# EAGLE board SaltwatersNanaPanel (EAGLE 9.6.2), part 1 of 2
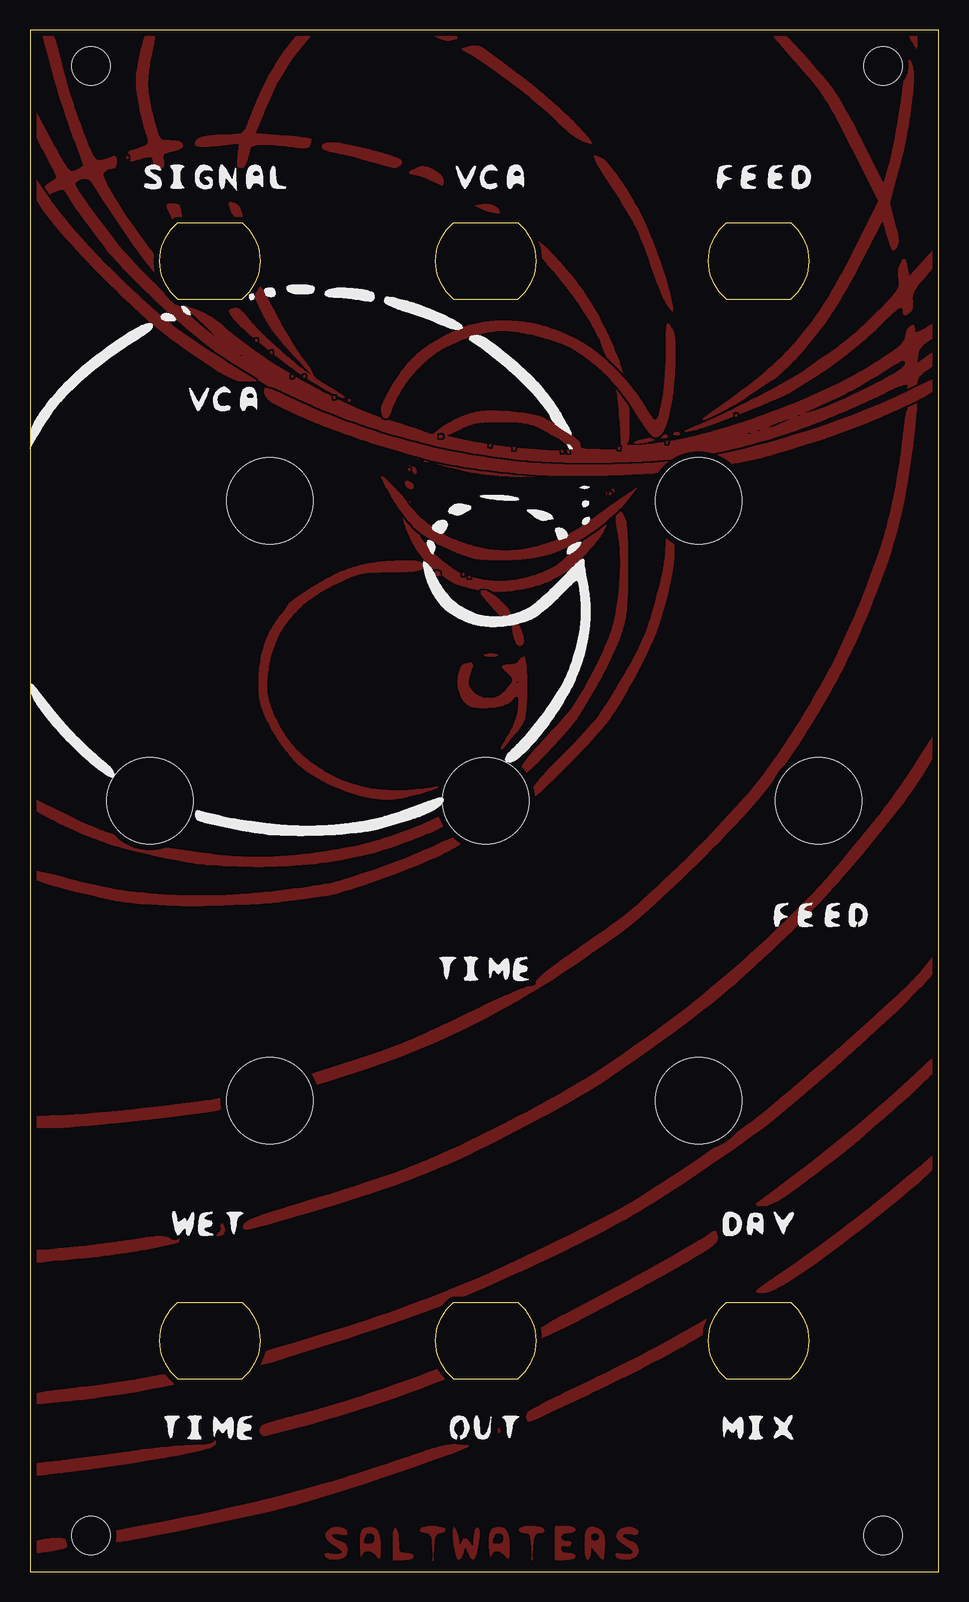
[diagram p0: board, top side]
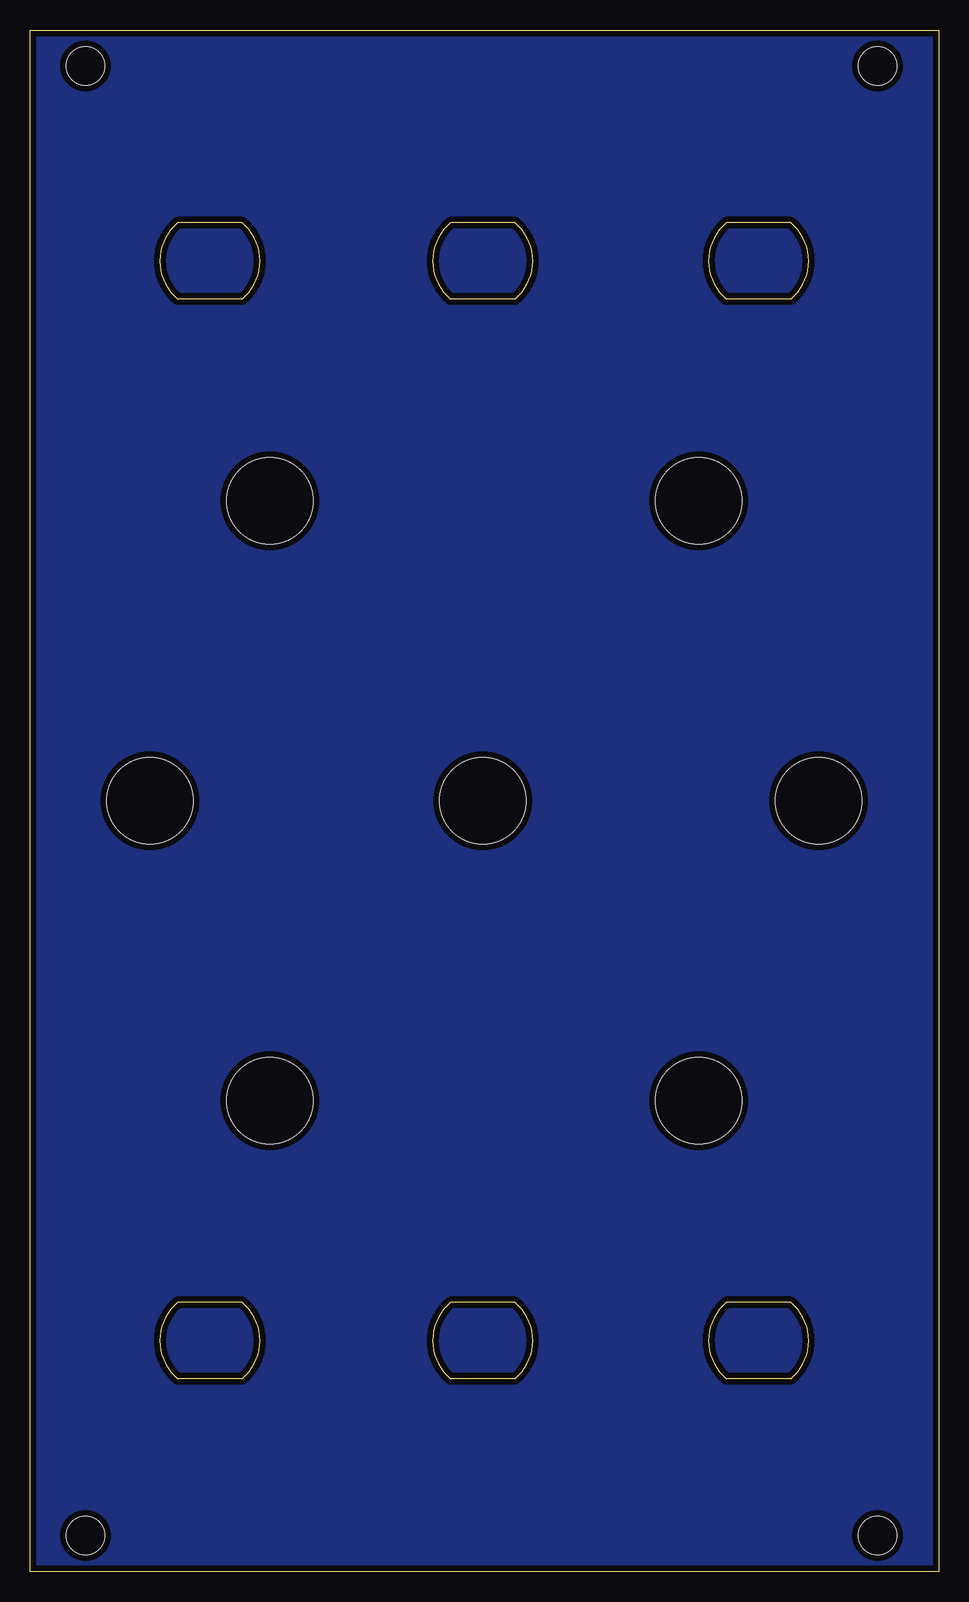
[diagram p1: board, bottom side, seen from below]

Size 75.75 x 128.5 mm. Coordinates in mm from the lower left corner, seen from the top.
Outline: 0,0 75.75,0 75.75,128.5 0,128.5 0,0
Copper layers (1*16): Top 0.035mm / dielectric 1.6mm / Bottom 0.035mm
Design rules "Elecrow_2-layer_PCB_eagle_rule": minimum track width 6mil, minimum drill 12mil, track to track 6mil, track to pad 6mil, pad to pad 6mil, via to via 8mil, smd to smd 0mil, copper to edge 20mil, drill to drill 10mil, minimum pad ring 6mil, minimum via ring 6mil, stop-mask expansion 0mil, vias tented up to drill 100mil, thermal gap 10mil
Holes 3.2 mm at 5.08,3 71.12,3 5.08,125.5 71.12,125.5

## Footprints (pad centres in the part's own frame; a part is rotated, then mirrored left to right if it is on the bottom)
ALPHA9MM_POT_CUTOUT = hole 7.2: 0,0

## Placement (x,y rotation side)
E$1  [CINCH_BANANA_CUTOUT]  15,109.25 90 top
E$2  [CINCH_BANANA_CUTOUT]  38,109.25 90 top
E$3  [CINCH_BANANA_CUTOUT]  60.75,109.25 90 top
E$4  [CINCH_BANANA_CUTOUT]  15,19.25 90 top
E$5  [CINCH_BANANA_CUTOUT]  38,19.25 90 top
E$6  [CINCH_BANANA_CUTOUT]  60.75,19.25 90 top
E$7  [ALPHA9MM_POT_CUTOUT]  20,89.25 0 top
E$8  [ALPHA9MM_POT_CUTOUT]  55.75,89.25 0 top
E$9  [ALPHA9MM_POT_CUTOUT]  10,64.25 0 top
E$10  [ALPHA9MM_POT_CUTOUT]  38,64.25 0 top
E$11  [ALPHA9MM_POT_CUTOUT]  65.75,64.25 0 top
E$12  [ALPHA9MM_POT_CUTOUT]  20,39.25 0 top
E$13  [ALPHA9MM_POT_CUTOUT]  55.75,39.25 0 top

## Library data of the parts
E$1-E$13 = ElectricNoodleBox

## Tracks (layer width: path | path; a pad name or v marks a point on that pad's centre or on a via)
AGND
  pour Bottom (rank 3): 0,0 75.75,0 75.75,128.5 0,128.5
GND
  pour Top (rank 3): 1.55,8.14 1.95,8.18 2.74,8.28 3.73,8.41 4.72,8.54 6.51,8.78 7.1,8.86 7.7,8.95 8.29,9.04 9.08,9.16 9.67,9.25 10.46,9.38 11.05,9.49 11.64,9.59 12.23,9.7 12.63,9.77 13.02,9.85 13.41,9.93 13.8,10.02 14,10.06 14.19,10.11 14.39,10.16 14.58,10.21 14.77,10.27 14.96,10.33 15.15,10.41 15.32,10.5 15.46,10.64 15.47,10.84 15.38,10.9 15.27,10.74 15.1,10.65 14.9,10.6 14.7,10.56 14.51,10.54 14.31,10.52 14.11,10.51 13.91,10.51 13.71,10.5 13.31,10.5 13.11,10.49 12.91,10.48 12.51,10.45 12.11,10.42 11.51,10.37 10.92,10.31 10.32,10.24 9.92,10.2 9.33,10.13 8.93,10.08 8.33,10 7.74,9.92 6.55,9.75 5.56,9.61 4.57,9.48 3.58,9.35 2.98,9.27 2.39,9.2 1.99,9.15 1.39,9.08 1.19,9.06 1,9.04 0.8,9.01 0.6,8.97 0.41,8.92 0.22,8.85 0.07,8.72 0,8.54 0,8.34 0.07,8.15 0.24,8.06 0.44,8.04 0.64,8.05 0.84,8.06 1.04,8.08 1.44,8.12
  pour Top (rank 3): 19.74,11.36 20.13,11.46 20.71,11.61 21.48,11.81 22.26,12 22.65,12.1 23.03,12.21 23.42,12.31 23.99,12.48 24.38,12.59 24.95,12.76 25.72,12.99 26.49,13.22 27.06,13.4 27.63,13.59 28.39,13.83 28.96,14.02 29.72,14.28 30.48,14.53 31.04,14.73 31.61,14.93 32.17,15.13 32.55,15.27 33.48,15.64 34.59,16.08 34.78,16.16 34.92,16.29 34.87,16.48 34.73,16.62 34.58,16.76 34.41,16.85 34.21,16.88 34.01,16.85 33.82,16.79 33.63,16.73 33.44,16.66 33.26,16.59 32.7,16.37 32.14,16.16 31.2,15.82 30.44,15.55 29.31,15.16 28.36,14.83 27.79,14.64 27.03,14.4 26.27,14.16 25.7,13.98 24.93,13.75 24.16,13.53 23.58,13.37 23.2,13.26 22.81,13.16 22.23,13.01 21.84,12.91 21.45,12.81 21.07,12.71 20.68,12.6 20.3,12.49 19.92,12.37 19.73,12.31 19.54,12.24 19.36,12.14 19.22,12.01 19.13,11.83 19.16,11.63 19.26,11.47 19.43,11.36 19.63,11.34
  pour Top (rank 3): 0.84,14.01 1.04,14.02 1.44,14.05 1.84,14.09 2.24,14.13 2.64,14.17 3.23,14.23 3.83,14.3 4.43,14.37 5.02,14.44 5.42,14.5 5.81,14.55 6.41,14.63 7.4,14.78 7.99,14.87 8.39,14.93 8.78,15 9.18,15.07 9.57,15.14 10.16,15.25 10.75,15.37 11.14,15.45 11.53,15.53 11.92,15.62 12.11,15.67 12.3,15.74 12.41,15.88 12.3,16.05 12.17,16.19 12.01,16.31 11.82,16.38 11.62,16.41 11.42,16.4 11.22,16.39 11.02,16.36 10.83,16.33 10.63,16.3 10.24,16.23 9.25,16.05 8.66,15.95 8.27,15.88 7.87,15.82 7.48,15.76 6.88,15.68 5.89,15.54 4.9,15.41 4.3,15.34 3.11,15.2 2.32,15.11 1.72,15.03 1.33,14.97 1.13,14.93 0.93,14.9 0.74,14.85 0.54,14.8 0.36,14.74 0.18,14.64 0.06,14.49 0.03,14.29 0.11,14.11 0.29,14.03 0.49,14.01
  pour Top (rank 3): 19.28,17.26 19.48,17.3 19.67,17.34 19.86,17.4 20.06,17.45 22.54,18.23 26.55,19.49 27.5,19.79 28.26,20.04 29.21,20.36 30.15,20.68 31.1,21.01 32.04,21.35 32.98,21.69 33.73,21.97 34.1,22.11 34.48,22.25 35.03,22.47 35.4,22.63 35.96,22.86 36.88,23.25 37.98,23.73 39.07,24.22 40.35,24.79 41.44,25.29 42.17,25.63 42.71,25.88 43.25,26.14 43.8,26.4 44.7,26.83 45.23,27.1 45.77,27.37 46.31,27.64 46.84,27.91 47.73,28.37 48.26,28.65 48.79,28.93 49.32,29.22 49.67,29.41 50.02,29.6 50.37,29.8 50.71,30 50.88,30.1 51.39,30.42 51.9,30.74 52.58,31.17 53.08,31.49 53.75,31.93 54.42,32.36 55.09,32.81 55.76,33.25 56.25,33.59 56.75,33.92 57.41,34.38 58.23,34.95 58.88,35.41 59.54,35.87 60.19,36.34 60.67,36.69 61.16,37.04 61.48,37.28 61.64,37.41 61.95,37.66 62.41,38.03 63.03,38.55 63.95,39.32 64.86,40.1 65.92,41.01 66.53,41.53 67.13,42.06 67.73,42.59 68.47,43.26 69.21,43.93 69.81,44.47 70.54,45.14 71.27,45.82 71.71,46.24 72.29,46.79 72.72,47.2 73.15,47.62 73.58,48.05 74,48.47 74.42,48.9 74.69,49.2 74.82,49.34 74.96,49.49 75.09,49.65 75.21,49.8 75.34,49.96 75.45,50.12 75.55,50.29 75.64,50.47 75.71,50.66 75.74,50.86 75.75,51.06 75.75,51.66 75.7,51.72 74.69,50.48 74.43,50.18 74.17,49.87 73.9,49.57 73.64,49.28 73.5,49.13 73.36,48.99 73.22,48.85 72.34,48.03 70.72,46.54 70.42,46.27 69.98,45.87 69.23,45.2 68.48,44.54 67.58,43.74 66.68,42.95 65.78,42.16 65.03,41.51 64.57,41.11 63.96,40.59 63.35,40.07 62.74,39.56 62.13,39.05 61.51,38.54 61.05,38.16 60.58,37.78 60.26,37.54 60.1,37.41 59.94,37.3 59.46,36.95 58.64,36.37 57.65,35.68 56.66,35 55.84,34.44 55.01,33.88 54.18,33.32 53.51,32.88 52.67,32.34 51.83,31.8 51.16,31.37 50.82,31.16 50.47,30.95 50.13,30.74 49.96,30.64 49.61,30.44 49.09,30.15 48.38,29.77 47.68,29.4 46.79,28.94 45.9,28.48 45,28.04 44.1,27.6 43.02,27.08 40.5,25.87 39.23,25.27 38.51,24.93 37.96,24.68 37.78,24.6 37.23,24.36 36.67,24.13 35.75,23.75 34.63,23.31 33.51,22.87 32.95,22.66 32.58,22.52 32.02,22.31 31.64,22.17 30.7,21.83 29.76,21.5 28.81,21.17 28.06,20.92 27.49,20.73 26.92,20.54 26.34,20.36 25.2,20 23.48,19.48 22.14,19.07 21.56,18.9 20.79,18.68 20.41,18.56 20.03,18.44 19.84,18.38 19.65,18.31 19.46,18.24 19.28,18.16 19.21,17.98 19.15,17.79 19.08,17.6 19.06,17.4 19.16,17.25
  pour Top (rank 3): 42.77,19.53 42.95,19.6 43.14,19.68 43.5,19.85 44.04,20.11 44.58,20.37 45.47,20.82 46.18,21.19 47.07,21.65 48.13,22.21 49.19,22.78 50.6,23.54 51.83,24.21 52.88,24.78 53.93,25.37 54.8,25.86 55.49,26.26 55.84,26.46 56.01,26.56 56.18,26.67 56.35,26.78 56.51,26.89 56.68,27.01 56.84,27.13 56.99,27.25 57.13,27.39 57.26,27.55 57.33,27.73 57.34,27.93 57.29,28.12 57.22,28.31 57.04,28.35 56.86,28.25 56.7,28.14 56.53,28.03 56.37,27.92 56.03,27.71 55.68,27.5 55.34,27.3 54.47,26.8 53.43,26.2 52.21,25.51 51.34,25.02 50.64,24.63 49.76,24.15 48.89,23.67 48.18,23.29 47.12,22.73 46.24,22.26 45.53,21.89 44.64,21.44 44.28,21.26 43.93,21.07 43.76,20.97 43.41,20.77 43.24,20.67 43.07,20.56 42.9,20.45 42.73,20.34 42.57,20.22 42.42,20.1 42.28,19.95 42.27,19.76 42.38,19.6 42.56,19.51
  pour Top (rank 3): 1.34,25.86 1.93,25.92 2.73,26 3.53,26.07 4.32,26.14 4.52,26.15 4.92,26.19 5.32,26.24 5.72,26.29 6.11,26.34 6.71,26.42 7.1,26.47 7.5,26.53 8.09,26.61 8.88,26.74 9.28,26.8 9.67,26.87 10.07,26.94 10.46,27.01 10.85,27.09 11.24,27.17 11.63,27.26 11.83,27.31 12.02,27.36 12.21,27.42 12.4,27.49 12.48,27.63 12.3,27.65 12.11,27.58 11.91,27.6 11.73,27.68 11.57,27.79 11.38,27.87 11.19,27.91 10.99,27.92 10.79,27.92 10.59,27.9 10.39,27.89 10.19,27.87 9.99,27.84 9.59,27.79 9.2,27.73 8.41,27.61 8.01,27.55 7.42,27.47 6.82,27.39 5.83,27.26 5.24,27.19 4.64,27.12 4.04,27.05 3.64,27.01 2.85,26.94 2.25,26.88 1.65,26.83 1.05,26.78 0.66,26.76 0.46,26.75 0.26,26.71 0.1,26.6 0.02,26.42 0,26.22 0.01,26.02 0.11,25.85 0.3,25.79 0.5,25.78 0.7,25.79 0.89,25.81 1.09,25.83
  pour Top (rank 3): 15.84,28 16.03,28.05 16.17,28.19 16.24,28.38 16.25,28.58 16.21,28.77 16.11,28.94 15.92,28.99 15.85,28.83 15.92,28.64 15.91,28.45 15.79,28.28 15.63,28.17 15.56,28.03 15.76,28
  pour Top (rank 3): 253 corners
  pour Top (rank 3): 61.28,30.5 61.47,30.54 61.67,30.6 61.85,30.67 62.03,30.76 62.21,30.85 62.38,30.95 62.55,31.05 62.72,31.16 62.89,31.27 63.22,31.49 63.39,31.61 63.71,31.84 64.04,32.07 64.36,32.31 64.68,32.55 65.16,32.91 65.64,33.27 66.27,33.76 67.22,34.5 68,35.12 68.32,35.36 68.63,35.62 68.78,35.74 69.09,36 69.7,36.52 70.46,37.17 71.51,38.1 72.41,38.89 73.3,39.69 73.89,40.23 74.33,40.64 74.62,40.92 74.76,41.06 74.9,41.2 75.04,41.35 75.17,41.49 75.3,41.65 75.43,41.8 75.54,41.97 75.64,42.14 75.71,42.33 75.74,42.53 75.74,42.73 75.71,42.92 75.54,42.97 75.37,42.87 75.21,42.75 75.06,42.62 74.91,42.49 74.76,42.35 74.46,42.08 73.3,40.99 72.71,40.44 71.97,39.77 71.22,39.11 70.77,38.71 70.32,38.32 69.87,37.92 69.41,37.53 69.1,37.28 68.8,37.02 68.49,36.77 68.02,36.39 67.24,35.76 66.62,35.26 65.68,34.52 64.89,33.91 64.41,33.54 63.93,33.18 61.86,31.61 61.06,31.01 60.58,30.64 60.61,30.54 60.81,30.51 61,30.5
  pour Top (rank 3): 1.95,37 2.15,37 2.35,37.01 2.75,37.03 3.35,37.07 4.15,37.13 4.95,37.19 5.74,37.27 6.54,37.34 7.53,37.44 8.33,37.53 9.32,37.64 10.52,37.78 11.51,37.9 12.5,38.02 13.49,38.15 14.48,38.28 15.08,38.37 15.28,38.4 15.47,38.43 15.67,38.48 15.86,38.54 16.04,38.63 16.2,38.74 16.34,38.88 16.45,39.05 16.48,39.25 16.43,39.44 16.24,39.48 16.04,39.45 15.84,39.41 15.65,39.38 15.45,39.35 15.05,39.29 14.66,39.24 14.06,39.16 12.67,38.98 11.09,38.79 9.5,38.6 8.5,38.49 7.31,38.36 6.31,38.27 5.32,38.18 4.52,38.11 3.72,38.05 3.12,38.01 2.72,37.99 2.52,37.99 1.72,37.97 1.32,37.95 1.12,37.94 0.92,37.93 0.73,37.92 0.53,37.89 0.33,37.85 0.14,37.78 0.02,37.63 0,37.43 0.05,37.24 0.2,37.12 0.39,37.06 0.59,37.03 0.79,37.02 0.99,37.01 1.19,37.01 1.39,37 1.79,37
  pour Top (rank 3): 300 corners
  pour Top (rank 3): 18.85,58.79 19.05,58.79 19.45,58.79 20.05,58.8 20.65,58.82 21.24,58.85 21.64,58.87 22.04,58.89 22.64,58.93 23.24,58.98 23.64,59.02 23.84,59.04 24.23,59.09 24.63,59.14 24.83,59.17 25.22,59.23 25.82,59.33 26.41,59.43 27,59.55 27.58,59.67 27.97,59.76 28.36,59.85 28.56,59.9 28.75,59.95 28.94,60.01 29.32,60.13 29.89,60.32 30.27,60.44 30.65,60.58 31.03,60.71 31.4,60.85 31.78,60.99 32.15,61.13 32.52,61.27 32.71,61.35 33.08,61.5 33.26,61.58 33.45,61.66 33.81,61.83 33.99,61.91 34.17,62 34.35,62.1 34.52,62.2 34.67,62.32 34.69,62.52 34.63,62.71 34.49,62.85 34.3,62.91 34.1,62.89 33.92,62.82 33.74,62.72 33.56,62.63 33.38,62.55 33.01,62.39 32.46,62.16 32.09,62.01 31.72,61.86 31.34,61.72 31.15,61.65 30.78,61.52 30.21,61.32 29.64,61.13 29.07,60.95 28.68,60.84 28.3,60.73 28.11,60.68 27.91,60.63 27.52,60.54 27.33,60.5 26.93,60.42 26.35,60.3 25.76,60.19 25.17,60.09 24.77,60.02 24.18,59.93 23.78,59.88 23.38,59.83 22.79,59.76 22.19,59.7 21.59,59.65 20.99,59.6 20.4,59.56 19.8,59.53 19.4,59.51 19.2,59.51 19,59.51 18.8,59.51 18.6,59.51 18.4,59.52 18,59.53 17.6,59.56 17.2,59.58 16.8,59.61 16.4,59.65 15.8,59.7 15.41,59.75 15.01,59.79 14.61,59.84 14.22,59.89 12.83,60.09 11.64,60.26 10.65,60.39 9.86,60.5 9.66,60.53 9.46,60.56 9.27,60.6 9.07,60.65 8.88,60.7 8.68,60.75 8.49,60.8 8.3,60.87 8.11,60.93 7.93,61.01 7.75,61.1 7.57,61.19 7.39,61.26 7.2,61.34 7.01,61.41 6.82,61.48 6.63,61.54 6.25,61.64 6.06,61.71 5.87,61.78 5.69,61.86 5.5,61.93 5.13,62.09 4.77,62.25 4.4,62.41 4.04,62.58 3.5,62.84 3.14,63.01 1.16,63.98 0.26,64.42 0.09,64.42 0.01,64.24 0,64.04 0.07,63.85 0.2,63.7 0.35,63.57 0.52,63.46 0.68,63.35 0.85,63.24 1.03,63.14 1.2,63.05 1.38,62.95 1.73,62.77 2.09,62.59 2.45,62.41 2.99,62.15 3.35,61.98 3.72,61.81 4.08,61.65 4.45,61.49 4.82,61.34 5.19,61.19 5.56,61.05 5.75,60.98 6.13,60.85 6.32,60.78 6.7,60.66 7.08,60.54 7.46,60.43 7.66,60.37 8.04,60.26 8.43,60.16 8.82,60.06 9.21,59.97 9.59,59.88 10.38,59.71 10.96,59.58 11.35,59.5 11.94,59.38 12.33,59.3 12.73,59.23 13.12,59.16 13.52,59.09 13.71,59.06 13.91,59.03 14.11,59.01 14.51,58.97 14.71,58.95 15.11,58.93 15.71,58.89 16.1,58.87 16.5,58.85 17.3,58.82 17.7,58.81 18.1,58.8 18.7,58.79
  pour Top (rank 3): 41.26,66.51 41.42,66.63 41.57,66.77 41.72,66.9 42.01,67.18 42.29,67.46 42.71,67.88 43.13,68.31 43.41,68.6 43.68,68.9 44.09,69.34 44.49,69.79 44.75,70.08 45.01,70.39 45.27,70.69 45.4,70.85 45.52,71 45.64,71.17 45.75,71.33 45.86,71.5 46.07,71.84 46.37,72.36 46.78,73.05 47.18,73.74 47.48,74.26 47.67,74.61 47.86,74.97 48.04,75.32 48.22,75.68 48.4,76.04 48.48,76.22 48.65,76.58 48.82,76.95 48.97,77.31 49.13,77.68 49.2,77.87 49.27,78.06 49.33,78.25 49.39,78.44 49.45,78.63 49.5,78.82 49.55,79.02 49.6,79.21 49.64,79.41 49.67,79.6 49.7,79.8 49.73,80 49.75,80.2 49.77,80.4 49.79,80.6 49.8,80.8 49.83,81.2 49.84,81.6 49.85,82 49.86,82.6 49.87,83.4 49.87,84.2 49.86,84.8 49.85,85.39 49.84,85.79 49.82,86.19 49.8,86.59 49.78,86.79 49.76,86.99 49.74,87.19 49.71,87.39 49.67,87.59 49.62,87.78 49.54,87.96 49.43,88.13 49.3,88.28 49.13,88.38 48.95,88.3 48.88,88.12 48.85,87.92 48.85,87.72 48.87,87.52 48.89,87.32 48.91,87.13 48.94,86.93 48.98,86.73 49.05,86.34 49.08,86.14 49.11,85.94 49.13,85.74 49.15,85.54 49.17,85.35 49.18,85.15 49.19,84.95 49.2,84.75 49.21,84.35 49.21,84.15 49.21,83.75 49.2,83.35 49.19,82.95 49.17,82.55 49.15,82.35 49.14,82.15 49.1,81.75 49.05,81.35 49.02,81.15 48.97,80.76 48.9,80.36 48.84,79.97 48.8,79.77 48.76,79.58 48.72,79.38 48.67,79.19 48.63,78.99 48.58,78.8 48.52,78.61 48.46,78.41 48.4,78.23 48.33,78.04 48.26,77.85 48.11,77.48 47.95,77.11 47.79,76.74 47.63,76.38 47.46,76.02 47.29,75.66 47.11,75.3 46.92,74.94 46.83,74.77 46.64,74.42 46.35,73.89 46.05,73.37 45.85,73.03 45.64,72.68 45.43,72.34 45.32,72.17 45.21,72.01 45.1,71.84 44.97,71.69 44.85,71.53 44.72,71.38 44.45,71.08 44.19,70.78 43.92,70.48 43.65,70.18 43.11,69.59 42.43,68.86 42.16,68.57 41.9,68.27 41.64,67.96 41.51,67.81 41.39,67.65 41.27,67.49 41.15,67.33 41.03,67.17 40.93,66.99 40.86,66.81 40.96,66.65 41.12,66.53
  pour Top (rank 3): 40.18,81.79 40.38,81.81 40.58,81.84 40.77,81.88 40.97,81.91 41.17,81.95 41.36,81.99 41.56,82.03 41.75,82.07 41.95,82.12 42.14,82.17 42.34,82.23 42.53,82.28 42.72,82.35 42.9,82.42 43.09,82.5 43.27,82.58 43.45,82.66 43.63,82.75 43.81,82.84 43.99,82.94 44.16,83.03 44.33,83.13 44.5,83.24 44.67,83.36 44.82,83.48 44.98,83.6 45.13,83.73 45.28,83.87 45.43,84 45.58,84.13 45.87,84.41 46.16,84.69 46.3,84.83 46.43,84.97 46.57,85.12 46.71,85.27 46.84,85.42 46.97,85.57 47.1,85.73 47.22,85.88 47.35,86.04 47.47,86.19 47.59,86.36 47.7,86.52 47.81,86.68 47.91,86.86 48,87.04 48.07,87.23 48.09,87.43 47.93,87.47 47.77,87.36 47.61,87.24 47.45,87.11 47.3,86.98 47.15,86.85 46.86,86.58 46.71,86.44 46.43,86.16 46,85.74 45.57,85.32 45.28,85.04 45.13,84.91 44.84,84.64 44.69,84.5 44.39,84.24 44.24,84.11 44.08,83.99 43.92,83.86 43.76,83.75 43.58,83.66 43.4,83.57 43.22,83.48 43.04,83.4 42.86,83.32 42.67,83.25 42.48,83.17 42.29,83.11 42.11,83.04 41.92,82.98 41.73,82.92 41.53,82.86 41.34,82.81 41.15,82.76 40.95,82.72 40.75,82.68 40.56,82.65 40.36,82.61 40.16,82.59 39.96,82.57 39.76,82.55 39.56,82.54 39.36,82.53 39.16,82.53 38.96,82.53 38.76,82.54 38.56,82.55 38.36,82.56 38.17,82.58 37.97,82.61 37.77,82.64 37.57,82.68 37.38,82.72 37.18,82.76 36.99,82.81 36.79,82.86 36.6,82.92 36.41,82.98 36.22,83.04 36.04,83.12 35.85,83.2 35.68,83.29 35.5,83.39 35.33,83.5 35.17,83.61 35.01,83.72 34.84,83.84 34.68,83.96 34.53,84.09 34.37,84.21 34.22,84.34 34.07,84.47 33.92,84.61 33.77,84.74 33.63,84.88 33.49,85.03 33.36,85.17 33.22,85.32 33.09,85.47 32.96,85.63 32.84,85.78 32.72,85.94 32.61,86.11 32.51,86.29 32.46,86.48 32.37,86.65 32.25,86.82 32.13,86.97 32,87.12 31.86,87.27 31.71,87.41 31.14,87.96 31.02,88.06 31.24,87.29 31.3,87.1 31.37,86.91 31.44,86.73 31.52,86.54 31.6,86.36 31.69,86.18 31.78,86 31.87,85.82 31.96,85.64 32.06,85.47 32.16,85.3 32.27,85.13 32.38,84.96 32.5,84.8 32.63,84.65 32.75,84.49 32.88,84.34 33.02,84.19 33.15,84.05 33.3,83.9 33.44,83.77 33.59,83.64 33.75,83.51 33.91,83.39 34.07,83.27 34.39,83.04 34.56,82.92 34.72,82.81 34.89,82.7 35.06,82.6 35.23,82.49 35.41,82.41 35.6,82.33 35.79,82.26 35.98,82.2 36.17,82.14 36.36,82.09 36.55,82.03 36.74,81.98 36.94,81.93 37.13,81.89 37.33,81.85 37.53,81.82 37.73,81.79 37.92,81.77 38.12,81.76 38.32,81.74 38.52,81.73 38.72,81.73 38.92,81.72 39.12,81.72 39.32,81.73 39.52,81.73 39.72,81.74 39.92,81.76
  pour Top (rank 3): 31.73,88.95 31.69,89.14 31.53,89.16 31.5,88.97 31.58,88.8
  pour Top (rank 3): 48.23,89.8 48.19,89.98 48.02,89.94 48.06,89.77
  pour Top (rank 3): 48.72,90.04 48.71,90.22 48.53,90.2 48.55,90.03
  pour Top (rank 3): 31.85,90.26 31.99,90.39 31.96,90.58 31.83,90.73 31.65,90.83 31.46,90.88 31.27,90.84 31.28,90.65 31.37,90.48 31.51,90.34 31.7,90.26
  pour Top (rank 3): 41.24,91.31 43.84,91.33 43.71,91.34 41.52,91.51 41.12,91.55 40.32,91.62 39.72,91.68 39.33,91.72 38.93,91.76 38.33,91.83 37.93,91.88 37.54,91.93 37.14,91.98 36.15,92.12 35.16,92.27 34.37,92.39 34.17,92.41 33.97,92.43 33.89,92.38 34.08,92.32 34.27,92.26 34.66,92.16 35.05,92.06 35.44,91.97 36.22,91.79 36.41,91.74 36.61,91.7 36.8,91.66 37,91.63 37.2,91.59 37.59,91.53 37.79,91.5 37.99,91.48 38.39,91.43 38.78,91.39 39.18,91.36 39.58,91.34 39.98,91.33 40.38,91.32 40.78,91.31 40.98,91.31
  pour Top (rank 3): 32.24,91.62 32.22,91.81 32.09,91.96 31.92,92.07 31.73,92.14 31.56,92.14 31.67,91.97 31.8,91.82 31.93,91.67 32.08,91.54
  pour Top (rank 3): 880 corners
  pour Top (rank 3): 33.22,92.52 33.42,92.56 33.36,92.69 33.16,92.72 32.97,92.68 32.86,92.56 33.05,92.52
  pour Top (rank 3): 32.47,92.79 32.46,92.97 32.28,92.95 32.3,92.78
  pour Top (rank 3): 31.71,93.03 31.72,93.21 31.54,93.22 31.54,93.04
  pour Top (rank 3): 30.94,93.27 30.98,93.45 30.8,93.48 30.78,93.3
  pour Top (rank 3): 50.63,94.05 50.83,94.06 51.03,94.09 51.22,94.12 51.42,94.16 51.61,94.21 51.81,94.27 51.99,94.33 52.14,94.43 51.94,94.45 51.74,94.44 51.54,94.42 51.34,94.39 51.14,94.35 50.95,94.31 50.76,94.25 50.57,94.19 50.38,94.11 50.5,94.05
  pour Top (rank 3): 53.03,94.52 53.2,94.6 53.06,94.71 52.86,94.71 52.67,94.65 52.66,94.54
  pour Top (rank 3): 54,94.77 54.19,94.83 54.08,94.95 53.89,94.97 53.69,94.92 53.63,94.8 53.83,94.77
  pour Top (rank 3): 54.66,95.02 54.85,95.05 55.05,95.09 55.24,95.14 55.44,95.19 55.63,95.24 55.82,95.3 56.01,95.35 56.2,95.42 56.39,95.48 56.77,95.61 57.33,95.82 57.9,96.03 58.64,96.31 59.39,96.6 60.13,96.9 61.06,97.28 61.8,97.59 62.16,97.74 62.53,97.9 62.9,98.07 63.08,98.15 63.25,98.24 63.43,98.34 63.77,98.55 64.11,98.76 64.45,98.97 64.79,99.18 65.29,99.51 65.63,99.73 66.13,100.05 66.46,100.28 66.63,100.39 66.96,100.62 67.12,100.74 67.44,100.97 67.6,101.1 67.92,101.34 68.39,101.71 68.85,102.09 69.32,102.47 69.62,102.73 69.77,102.86 70.07,103.13 70.22,103.27 70.51,103.54 70.65,103.68 71.08,104.1 71.36,104.38 71.65,104.66 71.8,104.8 71.94,104.93 72.09,105.06 72.25,105.19 72.41,105.31 72.58,105.41 72.74,105.35 72.76,105.15 72.79,104.95 72.88,104.78 73.07,104.78 73.25,104.88 73.4,105 73.52,105.16 73.59,105.35 73.62,105.55 73.62,105.75 73.6,105.95 73.58,106.15 73.59,106.35 73.64,106.54 73.72,106.72 73.81,106.9 73.92,107.06 74.04,107.23 74.16,107.38 74.29,107.54 74.42,107.69 74.68,107.99 74.81,108.15 74.94,108.3 75.06,108.46 75.18,108.62 75.3,108.78 75.41,108.95 75.51,109.12 75.59,109.3 75.67,109.49 75.72,109.68 75.74,109.88 75.74,110.08 75.72,110.28 75.58,110.35 75.42,110.23 75.27,110.09 75.14,109.94 74.87,109.65 73.41,108 73.31,108 73.11,108.98 73.06,109.17 73,109.36 72.84,109.41 72.7,109.26 72.59,109.1 72.5,108.91 72.45,108.72 72.42,108.53 72.4,108.33 72.4,108.13 72.41,107.93 72.43,107.73 72.45,107.53 72.45,107.33 72.42,107.13 72.36,106.94 72.26,106.76 72.15,106.6 72.03,106.44 71.91,106.28 71.77,106.13 71.64,105.98 71.5,105.84 71.37,105.69 71.09,105.4 70.53,104.83 70.24,104.55 69.96,104.27 69.67,104 69.37,103.73 68.92,103.33 68.62,103.07 68.32,102.81 68.01,102.55 67.69,102.31 67.54,102.18 67.38,102.06 67.21,101.95 66.55,101.5 65.89,101.04 65.57,100.81 65.24,100.58 64.92,100.34 64.6,100.11 64.43,99.99 64.26,99.89 64.09,99.78 63.92,99.68 63.58,99.47 63.06,99.18 62.53,98.88 62.18,98.69 61.65,98.41 61.3,98.22 60.77,97.94 60.23,97.67 59.7,97.4 59.16,97.13 58.62,96.87 58.08,96.61 57.72,96.44 57.17,96.18 56.81,96.01 56.45,95.85 56.08,95.69 55.9,95.61 55.52,95.47 55.34,95.39 55.15,95.31 54.97,95.23 54.79,95.15 54.62,95.05
  pour Top (rank 3): 249 corners
  pour Top (rank 3): 26.65,97.5 26.75,97.66 26.59,97.75 26.51,97.59
  pour Top (rank 3): 26.22,97.9 26.06,98.02 25.89,98.13 25.73,98.24 25.56,98.35 25.21,98.55 24.7,98.85 24.53,98.96 24.36,99.07 24.19,99.18 24.03,99.29 23.87,99.41 23.72,99.55 23.61,99.71 23.58,99.9 23.48,100.08 23.38,100.25 23.27,100.41 23.15,100.58 23.03,100.74 22.91,100.9 22.66,101.21 22.54,101.37 22.43,101.53 22.31,101.7 22.1,102.03 21.88,102.37 21.67,102.71 21.47,103.06 21.27,103.4 21.07,103.75 20.88,104.1 20.69,104.45 20.6,104.63 20.24,105.34 20.05,105.7 19.87,106.05 19.77,106.23 19.67,106.4 19.57,106.58 19.47,106.75 19.36,106.91 19.23,107.07 19.07,107.18 18.89,107.11 18.78,106.94 18.71,106.75 18.7,106.55 18.73,106.36 18.78,106.16 18.85,105.98 18.93,105.79 19.01,105.61 19.09,105.43 19.18,105.25 19.27,105.07 19.37,104.89 19.56,104.54 19.66,104.37 19.76,104.19 19.86,104.02 19.97,103.85 20.08,103.69 20.2,103.53 20.32,103.37 20.44,103.21 20.56,103.05 20.69,102.89 20.94,102.59 21.2,102.28 21.47,101.98 21.73,101.68 21.87,101.54 22.28,101.1 22.55,100.81 22.82,100.51 22.95,100.36 23.09,100.21 23.21,100.06 23.33,99.9 23.37,99.76 23.2,99.86 23.03,99.97 22.87,100.09 22.71,100.21 22.55,100.33 22.4,100.46 22.09,100.71 21.93,100.84 21.63,101.09 21.33,101.36 21.02,101.62 20.72,101.88 20.43,102.15 19.98,102.55 19.69,102.83 19.54,102.96 19.4,103.1 19.26,103.25 18.98,103.53 18.71,103.83 18.57,103.97 18.31,104.27 18.18,104.43 18.05,104.58 17.93,104.74 17.8,104.89 17.66,105.03 17.51,105.16 17.33,105.26 17.14,105.31 16.94,105.28 16.76,105.21 16.62,105.08 16.67,104.89 16.78,104.72 16.9,104.56 17.02,104.41 17.15,104.26 17.29,104.11 17.43,103.97 17.58,103.83 17.72,103.69 18.02,103.42 18.31,103.16 18.62,102.89 18.92,102.64 19.07,102.51 19.38,102.25 19.85,101.88 20.32,101.51 20.8,101.14 21.28,100.78 21.6,100.54 21.92,100.3 22.24,100.07 22.41,99.95 22.74,99.73 22.91,99.62 23.24,99.4 23.58,99.19 23.92,98.98 24.27,98.78 24.62,98.58 24.79,98.49 25.32,98.2 25.68,98.02 26.03,97.84
  pour Top (rank 3): 49.42,99.95 49.37,100.14 49.31,100.33 49.25,100.52 49.18,100.71 49.04,101.09 48.97,101.28 48.9,101.46 48.75,101.83 48.67,102.02 48.51,102.38 48.26,102.93 48.01,103.47 47.83,103.83 47.65,104.19 47.56,104.37 47.46,104.54 47.27,104.89 47.06,105.24 46.96,105.41 46.75,105.75 46.54,106.09 46.32,106.42 46.1,106.75 45.98,106.92 45.87,107.08 45.75,107.24 45.63,107.4 45.38,107.71 45.13,108.02 45,108.18 44.74,108.49 44.48,108.79 44.22,109.09 44.08,109.24 43.81,109.53 43.67,109.68 43.53,109.82 43.25,110.1 42.96,110.38 42.81,110.51 42.67,110.65 42.51,110.78 42.36,110.9 42.18,111 42.08,110.85 42.09,110.65 42.13,110.46 42.21,110.27 42.31,110.1 42.42,109.93 42.54,109.77 42.65,109.61 42.78,109.45 42.9,109.29 43.03,109.14 43.16,108.99 43.29,108.83 43.56,108.54 43.69,108.39 43.82,108.24 43.95,108.08 44.2,107.77 44.33,107.62 44.57,107.3 44.82,106.99 45.06,106.66 45.29,106.34 45.52,106.02 45.75,105.69 45.98,105.36 46.2,105.02 46.3,104.85 46.51,104.51 46.72,104.17 46.91,103.82 47.01,103.65 47.11,103.47 47.2,103.29 47.29,103.11 47.38,102.93 47.46,102.75 47.54,102.57 47.62,102.39 47.69,102.2 47.81,101.82 47.88,101.63 47.96,101.45 48.05,101.27 48.15,101.09 48.25,100.92 48.36,100.76 48.49,100.6 48.62,100.45 48.77,100.32 48.92,100.19 49.08,100.06 49.24,99.95 49.42,99.85
  pour Top (rank 3): 12.56,112.52 12.66,112.69 12.68,112.88 12.65,113.08 12.6,113.28 12.56,113.47 12.48,113.86 12.31,113.95 12.11,113.99 11.91,114 11.71,114 11.51,113.98 11.38,113.86 11.44,113.66 11.68,113.12 11.77,112.94 11.88,112.77 12,112.61 12.15,112.48 12.33,112.41
  pour Top (rank 3): 17.73,112.76 17.73,112.96 17.7,113.16 17.65,113.36 17.58,113.54 17.47,113.71 17.34,113.86 17.19,113.99 17.01,114.07 16.81,114.11 16.62,114.09 16.58,113.91 16.63,113.71 16.69,113.52 16.78,113.34 16.88,113.17 17,113.01 17.14,112.86 17.3,112.74 17.47,112.64 17.66,112.6
  pour Top (rank 3): 38.98,113.26 39.18,113.28 39.15,113.44 39.02,113.59 38.87,113.72 38.7,113.83 38.51,113.9 38.32,113.94 38.12,113.96 37.92,113.95 37.72,113.92 37.13,113.84 37.67,113.6 37.86,113.52 38.04,113.45 38.23,113.39 38.43,113.34 38.62,113.29 38.82,113.27
  pour Top (rank 3): 0.48,113.95 0.66,114.04 0.71,114.18 0.57,114.33 0.42,114.46 0.27,114.59 0.09,114.66 0.01,114.49 0,114.29 0.02,114.09 0.1,113.91 0.29,113.88
  pour Top (rank 3): 34.49,115.67 34.5,115.87 34.48,116.07 34.39,116.25 34.26,116.4 34.11,116.53 33.94,116.65 33.77,116.75 33.59,116.84 33.41,116.92 33.23,117 33.04,117.07 32.85,117.12 32.65,117.12 32.45,117.07 32.27,117 32.09,116.91 31.91,116.81 31.74,116.71 31.59,116.59 31.74,116.51 31.94,116.5 32.14,116.46 32.33,116.41 32.52,116.35 32.71,116.29 32.9,116.22 33.09,116.14 33.27,116.06 33.99,115.72 34.36,115.56
  pour Top (rank 3): 10.98,117.01 11.15,117.09 11.21,117.28 11.18,117.48 11.14,117.67 11.1,117.87 11.12,118.07 11.25,118.21 11.43,118.29 11.62,118.34 12.01,118.42 12.21,118.48 12.39,118.55 12.57,118.65 12.71,118.79 12.74,118.98 12.61,119.12 12.42,119.19 12.22,119.23 12.03,119.24 11.83,119.25 11.63,119.25 11.43,119.25 11.23,119.27 11.03,119.33 10.88,119.44 10.77,119.61 10.69,119.8 10.63,119.99 10.46,120.56 10.4,120.76 10.3,121.14 10.21,121.53 10.12,121.92 10.08,122.12 10,122.51 9.93,122.9 9.89,123.1 9.86,123.3 9.84,123.5 9.83,123.7 9.83,123.9 9.83,124.1 9.84,124.3 9.85,124.5 9.87,124.7 9.89,124.89 9.91,125.09 9.93,125.29 9.96,125.49 9.99,125.69 10.02,125.88 10.06,126.08 10.33,127.45 10.41,127.85 10.48,128.24 10.46,128.42 10.27,128.48 10.07,128.5 9.88,128.45 9.74,128.31 9.64,128.14 9.56,127.96 9.5,127.77 9.44,127.57 9.38,127.38 9.34,127.19 9.29,126.99 9.24,126.8 9.16,126.41 9.07,126.02 9.03,125.82 8.99,125.63 8.96,125.43 8.93,125.23 8.9,125.03 8.87,124.83 8.85,124.64 8.84,124.44 8.84,124.24 8.84,124.04 8.85,123.84 8.87,123.64 8.89,123.44 8.92,123.24 8.95,123.04 8.98,122.84 9.05,122.45 9.08,122.25 9.16,121.86 9.25,121.47 9.34,121.08 9.43,120.69 9.48,120.5 9.53,120.31 9.59,120.11 9.65,119.92 9.72,119.73 9.78,119.55 9.84,119.35 9.86,119.15 9.79,118.97 9.63,118.86 9.44,118.78 8.88,118.58 8.31,118.38 8.17,118.24 8.13,118.05 8.17,117.86 8.28,117.69 8.45,117.6 8.65,117.6 8.84,117.67 9.03,117.73 9.22,117.79 9.41,117.84 9.61,117.89 9.8,117.94 10,117.96 10.18,117.88 10.24,117.7 10.25,117.5 10.28,117.3 10.37,117.13 10.55,117.03 10.74,117
  pour Top (rank 3): 17.61,117 17.79,117.07 17.93,117.21 18.04,117.38 18.11,117.57 18.16,117.76 18.2,117.95 18.3,118.34 18.35,118.54 18.41,118.73 18.56,118.85 18.75,118.91 18.95,118.95 19.15,118.97 19.35,118.98 19.55,118.98 19.75,118.98 19.95,118.97 20.35,118.94 20.75,118.91 20.94,118.89 21.34,118.85 21.54,118.83 21.74,118.8 22.14,118.75 22.33,118.73 22.53,118.71 22.73,118.69 22.93,118.7 23.13,118.73 23.3,118.83 23.39,119.01 23.44,119.2 23.43,119.4 23.24,119.45 23.04,119.48 22.65,119.52 22.05,119.59 21.65,119.63 21.25,119.66 18.86,119.87 18.87,120.02 19.47,121.5 19.62,121.87 19.77,122.24 20.01,122.79 20.18,123.15 20.26,123.33 20.43,123.7 20.52,123.88 20.61,124.05 20.7,124.23 20.8,124.41 20.9,124.58 21,124.75 21.21,125.1 21.42,125.43 21.53,125.6 21.75,125.94 21.86,126.1 21.98,126.27 22.1,126.43 22.22,126.59 22.46,126.9 22.71,127.22 22.84,127.37 22.97,127.52 23.1,127.67 23.23,127.83 23.76,128.42 23.84,128.54 23.24,128.47 23.04,128.45 22.85,128.4 22.67,128.32 22.5,128.22 22.34,128.09 22.19,127.96 22.05,127.81 21.92,127.66 21.79,127.51 21.67,127.35 21.55,127.19 21.31,126.87 21.08,126.55 20.96,126.38 20.85,126.22 20.74,126.05 20.63,125.88 20.42,125.54 20.22,125.2 20.02,124.85 19.83,124.5 19.64,124.15 19.46,123.79 19.28,123.43 19.2,123.25 19.12,123.07 19.04,122.88 18.36,121.21 17.98,120.29 17.89,120.11 17.76,119.96 17.59,119.86 17.4,119.8 17.2,119.77 17,119.76 16.8,119.75 16.4,119.75 16.2,119.74 16,119.74 15.8,119.73 15.6,119.72 15.4,119.7 15.2,119.68 15.01,119.66 14.81,119.64 14.61,119.61 14.41,119.57 14.22,119.51 14.04,119.42 13.88,119.31 13.76,119.15 13.78,118.95 13.94,118.84 14.13,118.81 14.33,118.8 14.53,118.8 14.73,118.81 14.93,118.82 15.13,118.84 15.53,118.87 17.32,119.04 17.45,118.99 17.32,118 17.29,117.8 17.28,117.6 17.27,117.4 17.29,117.21 17.39,117.04 17.59,117
  pour Top (rank 3): 30.57,117.05 30.75,117.14 30.9,117.27 31.02,117.42 30.96,117.6 30.8,117.71 30.62,117.8 30.43,117.87 30.24,117.94 30.05,118 29.86,118.06 29.48,118.18 28.9,118.35 28.52,118.45 28.32,118.51 27.94,118.6 27.55,118.7 27.16,118.79 26.77,118.87 26.37,118.95 26.18,118.98 25.98,119.02 25.78,119.05 25.58,119.07 25.38,119.08 25.18,119.08 24.98,119.07 24.79,119.05 24.59,119 24.41,118.92 24.32,118.76 24.44,118.61 24.62,118.51 24.8,118.45 25,118.4 25.39,118.33 25.59,118.28 25.78,118.24 26.17,118.15 26.75,118 27.33,117.85 27.72,117.74 28.68,117.47 29.26,117.31 29.84,117.16 30.03,117.11 30.23,117.06
  pour Top (rank 3): 73.94,127 73.98,127.19 73.99,127.39 74,127.59 74,127.79 73.99,127.99 73.95,128.18 73.87,128.37 73.72,128.49 73.52,128.49 73.34,128.41 73.25,128.24 73.29,128.04 73.37,127.86 73.46,127.68 73.55,127.51 73.66,127.34 73.78,127.17 73.91,127.02
S$1
  pour Top: 25.74,1.07 25.94,1.11 26.13,1.17 26.29,1.29 26.4,1.46 26.45,1.65 26.47,1.85 26.44,2.05 26.35,2.22 26.19,2.34 26.01,2.44 25.83,2.51 25.64,2.58 25.46,2.67 25.29,2.78 25.16,2.92 25.2,3.1 25.39,3.17 25.59,3.18 25.78,3.16 25.98,3.12 26.18,3.1 26.38,3.11 26.5,3.24 26.4,3.41 26.24,3.53 26.06,3.62 25.86,3.66 25.66,3.67 25.46,3.67 25.27,3.63 25.08,3.55 24.92,3.44 24.77,3.3 24.66,3.13 24.64,2.94 24.72,2.76 24.85,2.61 25,2.47 25.16,2.36 25.33,2.25 25.5,2.14 25.66,2.03 25.82,1.91 25.97,1.78 26.06,1.6 25.93,1.47 25.74,1.43 25.54,1.41 25.34,1.42 25.14,1.44 24.94,1.47 24.75,1.49 24.57,1.43 24.63,1.25 24.8,1.14 24.99,1.08 25.19,1.05 25.39,1.04 25.59,1.05
S$2
  pour Top: 27.74,1.48 27.87,1.63 28.05,1.73 28.24,1.74 28.43,1.68 28.61,1.59 28.76,1.46 28.9,1.32 29.03,1.16 29.18,1.16 29.22,1.35 29.23,1.55 29.24,1.75 29.24,1.95 29.24,2.15 29.23,2.35 29.22,2.55 29.19,2.75 29.15,2.94 29.1,3.14 29.02,3.32 28.9,3.48 28.73,3.58 28.54,3.64 28.34,3.67 28.14,3.66 27.95,3.61 27.77,3.52 27.64,3.37 27.58,3.18 27.54,2.98 27.53,2.78 27.53,2.59 27.81,2.5 27.86,2.68 27.93,2.87 27.99,3.06 28.09,3.21 28.28,3.25 28.48,3.23 28.64,3.11 28.73,2.93 28.75,2.73 28.72,2.54 28.62,2.37 28.44,2.28 28.24,2.25 28.07,2.26 27.88,2.32 27.81,2.48 27.53,2.57 27.53,2.38 27.53,2.18 27.53,1.98 27.54,1.78 27.56,1.58 27.58,1.38 27.66,1.27
S$3
  pour Top: 31.16,1 31.36,1.01 31.56,1.03 31.75,1.08 31.94,1.16 31.97,1.32 31.81,1.43 31.61,1.48 31.41,1.5 31.21,1.5 31.02,1.54 30.86,1.65 30.79,1.84 30.76,2.04 30.75,2.24 30.75,2.64 30.73,2.84 30.71,3.03 30.68,3.23 30.62,3.42 30.53,3.6 30.38,3.56 30.32,3.37 30.29,3.17 30.27,2.97 30.26,2.77 30.25,2.57 30.25,2.37 30.25,1.17 30.28,1 31.08,1
S$4
  pour Top: 33.7,2.24 33.72,2.44 33.75,2.63 33.78,2.83 33.85,3.02 33.97,3.17 34.16,3.24 34.36,3.25 34.55,3.3 34.64,3.46 34.5,3.59 34.31,3.66 34.12,3.7 33.92,3.73 33.72,3.74 33.52,3.75 33.32,3.75 33.12,3.73 32.92,3.7 32.73,3.66 32.55,3.58 32.54,3.4 32.71,3.3 32.9,3.25 33.1,3.25 33.29,3.19 33.42,3.04 33.48,2.84 33.51,2.65 33.52,2.45 33.54,2.25 33.55,2.05 33.58,1.05 33.59,0.9 33.67,1.9
S$5
  pour Top: 35.9,1.09 36.02,1.26 36.1,1.44 36.17,1.63 36.29,2.01 36.35,2.04 36.49,1.66 36.56,1.47 36.65,1.3 36.77,1.13 36.92,1.01 37.08,1.1 37.16,1.28 37.23,1.47 37.28,1.66 37.33,1.86 37.36,2.05 37.39,2.25 37.41,2.45 37.44,2.65 37.46,2.85 37.48,3.04 37.49,3.24 37.49,3.44 37.41,3.62 37.22,3.61 37.12,3.44 37.06,3.24 37.02,3.05 37,2.85 36.99,2.65 36.99,2.45 36.97,2.25 36.89,2.1 36.77,2.25 36.66,2.42 36.53,2.57 36.38,2.7 36.2,2.74 36.05,2.6 35.96,2.42 35.9,2.23 35.81,2.19 35.78,2.39 35.77,2.59 35.74,2.78 35.7,2.98 35.64,3.17 35.57,3.36 35.48,3.53 35.34,3.68 35.27,3.51 35.26,3.31 35.26,3.11 35.26,2.91 35.28,2.71 35.3,2.51 35.32,2.31 35.35,2.11 35.38,1.92 35.42,1.72 35.47,1.53 35.53,1.34 35.61,1.15 35.74,1
S$6
  pour Top: 38.5,1.49 38.63,1.63 38.81,1.73 39.01,1.74 39.19,1.68 39.37,1.58 39.52,1.45 39.66,1.31 39.79,1.15 39.94,1.17 39.97,1.36 39.98,1.56 39.99,1.76 39.99,1.96 39.99,2.16 39.98,2.36 39.97,2.56 39.94,2.76 39.9,2.96 39.84,3.15 39.76,3.33 39.64,3.49 39.47,3.59 39.28,3.65 39.08,3.67 38.88,3.66 38.69,3.6 38.51,3.51 38.39,3.35 38.32,3.17 38.29,2.97 38.28,2.77 38.28,2.58 38.56,2.51 38.62,2.69 38.68,2.88 38.74,3.07 38.85,3.22 39.05,3.25 39.24,3.23 39.39,3.1 39.48,2.92 39.5,2.72 39.47,2.52 39.36,2.36 39.18,2.27 38.98,2.25 38.81,2.26 38.62,2.32 38.56,2.49 38.28,2.56 38.28,2.37 38.28,2.17 38.29,1.97 38.29,1.77 38.31,1.57 38.34,1.37 38.41,1.28
S$7
  pour Top: 41.94,2.17 41.96,2.37 41.99,2.56 42.02,2.76 42.07,2.95 42.17,3.13 42.34,3.23 42.54,3.25 42.73,3.28 42.89,3.39 42.81,3.56 42.63,3.64 42.44,3.68 42.24,3.72 42.04,3.74 41.84,3.75 41.64,3.75 41.44,3.74 41.24,3.72 41.05,3.68 40.86,3.61 40.75,3.47 40.89,3.33 41.08,3.26 41.28,3.25 41.48,3.22 41.63,3.1 41.71,2.91 41.75,2.72 41.77,2.52 41.78,2.32 41.79,2.12 41.84,0.92 41.85,1.03 41.93,2.02
S$8
  pour Top: 44.79,1 44.99,1.02 45.18,1.06 45.37,1.12 45.5,1.26 45.37,1.4 45.18,1.47 44.98,1.5 44.78,1.5 44.59,1.53 44.4,1.61 44.28,1.76 44.25,1.95 44.32,2.14 44.51,2.19 44.7,2.14 44.9,2.13 45.08,2.2 45.14,2.38 44.97,2.48 44.77,2.5 44.57,2.53 44.39,2.61 44.27,2.77 44.26,2.96 44.38,3.12 44.55,3.21 44.75,3.24 44.95,3.25 45.15,3.28 45.34,3.33 45.49,3.46 45.4,3.61 45.22,3.68 45.02,3.72 44.82,3.74 44.62,3.75 43.82,3.75 43.75,3.62 43.75,1.02 43.93,1 44.53,1
S$9
  pour Top: 46.61,1.06 46.71,1.23 46.75,1.43 46.76,1.63 46.77,2.03 46.83,2.05 47.22,1.59 47.35,1.43 47.48,1.28 47.62,1.14 47.77,1.01 47.84,1.16 47.87,1.36 47.89,1.56 47.9,1.76 47.91,1.96 47.92,2.16 47.92,2.36 47.92,2.56 47.91,2.76 47.88,2.96 47.83,3.15 47.72,3.32 47.57,3.45 47.41,3.54 47.24,3.23 47.4,3.13 47.49,2.96 47.48,2.76 47.37,2.59 47.2,2.51 47.04,2.51 46.87,2.6 46.76,2.77 46.76,2.97 46.86,3.14 47.03,3.24 47.22,3.24 47.39,3.56 47.21,3.62 47.02,3.67 46.82,3.68 46.62,3.66 46.47,3.54 46.37,3.36 46.32,3.17 46.29,2.97 46.27,2.77 46.26,2.57 46.25,2.37 46.25,2.17 46.26,1.97 46.27,1.78 46.29,1.58 46.32,1.38 46.37,1.18 46.47,1.01
S$10
  pour Top: 49.88,1.05 50.08,1.08 50.27,1.13 50.45,1.21 50.59,1.35 50.67,1.54 50.71,1.73 50.72,1.93 50.66,2.12 50.53,2.28 50.37,2.39 50.19,2.47 50,2.54 49.81,2.61 49.64,2.71 49.48,2.83 49.39,3 49.52,3.14 49.72,3.18 49.92,3.18 50.12,3.15 50.31,3.11 50.51,3.1 50.7,3.14 50.72,3.32 50.58,3.47 50.41,3.57 50.23,3.64 50.03,3.67 49.83,3.67 49.63,3.65 49.44,3.6 49.26,3.51 49.1,3.38 48.97,3.23 48.89,3.05 48.91,2.86 49.02,2.69 49.16,2.55 49.31,2.42 49.48,2.31 49.82,2.1 49.98,1.98 50.14,1.86 50.27,1.71 50.28,1.53 50.1,1.45 49.91,1.42 49.71,1.41 49.51,1.42 49.11,1.48 48.91,1.48 48.82,1.35 48.95,1.19 49.13,1.11 49.32,1.06 49.52,1.04 49.72,1.04
S$11
  pour Top: 1.23,1.66 1.82,1.75 2.21,1.81 2.61,1.88 2.8,1.93 2.98,2.01 3.14,2.14 3.24,2.31 3.22,2.5 3.09,2.64 2.9,2.71 2.7,2.74 2.5,2.75 2.3,2.75 2.1,2.74 1.9,2.73 1.7,2.71 1.5,2.7 1.3,2.67 1.11,2.65 0.91,2.62 0.71,2.58 0.52,2.53 0.33,2.45 0.17,2.34 0.05,2.19 0,1.99 0.01,1.79 0.12,1.63 0.31,1.58 0.51,1.58 0.71,1.59 0.91,1.62
S$12
  pour Top: 7.41,2.5 7.61,2.53 7.81,2.56 8.2,2.62 8.79,2.72 9.78,2.9 10.76,3.09 11.94,3.32 12.92,3.51 13.9,3.72 15.07,3.96 16.44,4.25 17.61,4.51 18.98,4.81 19.96,5.03 20.73,5.21 21.12,5.31 21.7,5.46 22.09,5.57 22.47,5.68 23.24,5.9 24.01,6.13 24.97,6.42 25.92,6.72 26.87,7.02 27.82,7.33 28.77,7.64 29.34,7.84 30.1,8.09 31.99,8.75 33.69,9.34 34.44,9.61 35.01,9.81 35.38,9.95 35.57,10.02 35.75,10.09 36.49,10.4 36.57,10.46 35.57,10.55 35.37,10.55 35.17,10.55 34.97,10.53 34.78,10.5 34.58,10.47 34.38,10.43 34.19,10.39 33.99,10.34 33.8,10.29 33.61,10.24 33.42,10.18 33.22,10.12 33.03,10.06 32.84,10 32.09,9.73 31.52,9.54 30.57,9.22 29.63,8.9 28.68,8.59 27.73,8.28 26.77,7.97 26.2,7.79 25.63,7.62 25.05,7.45 24.28,7.22 23.71,7.06 22.94,6.84 22.36,6.68 21.59,6.48 20.81,6.27 20.04,6.07 19.46,5.93 18.87,5.79 18.29,5.65 17.31,5.43 16.34,5.21 15.56,5.04 14.58,4.83 13.8,4.66 13.21,4.54 12.62,4.42 12.03,4.31 11.25,4.15 9.87,3.9 8.49,3.63 7.71,3.48 7.32,3.4 7.12,3.36 6.94,3.29 6.81,3.13 6.75,2.94 6.78,2.75 6.91,2.6 7.1,2.53 7.29,2.5
S$13
  pour Top: 39.22,11.68 39.2,11.87 39.04,11.93 39,11.74 39.06,11.55
S$14
  pour Top: 41.78,12.55 41.96,12.63 42.33,12.79 43.24,13.21 44.32,13.72 45.41,14.23 46.31,14.66 47.03,15 47.75,15.35 48.83,15.89 49.72,16.33 50.79,16.87 51.86,17.42 52.57,17.79 53.28,18.16 53.98,18.54 54.51,18.83 55.03,19.13 55.37,19.33 55.55,19.44 55.71,19.54 55.88,19.65 56.05,19.77 56.21,19.88 56.37,20.01 56.52,20.14 56.65,20.28 56.78,20.44 56.88,20.61 56.96,20.79 57.19,21.35 57.24,21.5 55.68,20.6 55.33,20.4 54.64,20.01 53.59,19.43 52.71,18.95 52.01,18.57 51.65,18.38 51.3,18.19 50.59,17.83 49.88,17.46 48.98,17.01 48.09,16.57 47.37,16.22 46.65,15.87 46.11,15.61 45.02,15.09 44.66,14.92 44.3,14.74 43.77,14.48 43.23,14.21 42.7,13.93 42.35,13.74 42,13.55 41.82,13.45 41.65,13.34 41.49,13.23 41.4,13.05 41.37,12.85 41.43,12.67 41.57,12.53
S$15
  pour Top: 61.3,23.26 61.5,23.3 61.69,23.37 61.87,23.45 62.05,23.53 62.23,23.62 62.41,23.72 62.58,23.81 62.76,23.91 63.1,24.12 63.44,24.33 63.61,24.43 63.95,24.65 64.28,24.87 64.61,25.09 64.94,25.32 65.44,25.66 65.76,25.89 66.09,26.13 66.57,26.48 66.89,26.72 67.69,27.32 68.49,27.92 69.28,28.53 70.07,29.15 70.85,29.77 71.48,30.27 72.09,30.78 72.87,31.41 73.33,31.8 73.63,32.06 74.09,32.45 74.39,32.71 74.53,32.85 74.68,32.98 74.83,33.12 74.97,33.26 75.11,33.4 75.25,33.54 75.38,33.69 75.51,33.85 75.62,34.01 75.71,34.19 75.75,34.39 75.75,34.59 75.72,34.78 75.55,34.82 75.38,34.71 75.22,34.59 75.06,34.47 74.91,34.34 74.29,33.83 73.99,33.57 73.06,32.8 71.67,31.67 70.74,30.91 69.96,30.28 69.49,29.91 68.86,29.41 68.23,28.92 67.43,28.32 66.63,27.72 65.99,27.24 65.34,26.77 64.69,26.3 64.2,25.96 63.88,25.73 62.72,24.94 62.06,24.48 61.41,24.02 60.92,23.67 60.76,23.55 60.6,23.43 60.55,23.31 60.75,23.27 60.95,23.26 61.15,23.25
S$16
  pour Top: 13.77,55.52 14.17,55.53 14.57,55.53 15.37,55.54 16.17,55.56 16.97,55.59 17.77,55.63 18.37,55.66 18.77,55.68 19.17,55.7 19.57,55.73 20.17,55.78 20.57,55.81 20.76,55.83 21.16,55.88 21.96,55.97 22.55,56.05 22.95,56.1 23.74,56.21 24.33,56.31 24.73,56.37 24.92,56.4 25.12,56.44 25.32,56.48 25.51,56.53 25.7,56.58 25.9,56.64 26.28,56.75 26.66,56.87 27.23,57.06 27.8,57.24 28.37,57.44 28.94,57.63 29.5,57.84 29.88,57.97 30.25,58.11 30.81,58.32 31.19,58.47 31.74,58.69 32.3,58.91 32.67,59.07 33.04,59.22 33.41,59.38 33.77,59.54 34.14,59.7 34.32,59.79 34.5,59.88 34.68,59.97 34.85,60.06 35.03,60.15 35.2,60.25 35.38,60.36 35.54,60.46 35.71,60.57 35.87,60.69 36.02,60.82 36.13,60.99 35.99,61.13 35.81,61.22 35.62,61.25 35.42,61.2 35.23,61.14 35.05,61.07 34.86,60.99 34.68,60.92 34.49,60.84 34.31,60.75 34.13,60.67 33.59,60.41 33.41,60.33 33.22,60.25 32.86,60.09 32.3,59.85 31.75,59.62 31.01,59.33 30.45,59.11 29.89,58.9 29.32,58.69 28.76,58.49 28.19,58.3 27.81,58.17 27.43,58.04 26.86,57.86 26.29,57.69 25.9,57.57 25.71,57.52 25.52,57.47 25.32,57.42 25.13,57.37 24.93,57.33 24.74,57.29 24.54,57.26 24.14,57.19 23.75,57.13 23.16,57.04 22.56,56.96 21.97,56.88 21.37,56.8 20.78,56.73 20.18,56.67 19.58,56.6 19.18,56.56 18.59,56.51 17.99,56.45 17.59,56.42 16.99,56.38 16.39,56.35 15.79,56.32 15.39,56.31 14.79,56.3 14.19,56.29 13.79,56.3 13.19,56.3 12.79,56.32 12.19,56.34 11.8,56.36 11.2,56.39 10.6,56.44 10,56.49 9.4,56.54 8.81,56.6 8.41,56.65 8.01,56.7 7.62,56.75 7.42,56.78 7.22,56.81 7.02,56.85 6.63,56.92 6.24,57.01 5.85,57.09 5.26,57.23 4.87,57.32 4.29,57.46 3.71,57.6 3.32,57.7 2.93,57.8 2.16,58.01 1.77,58.1 1.58,58.15 1.19,58.24 0.99,58.28 0.8,58.32 0.6,58.36 0.4,58.39 0.21,58.42 0.04,58.35 0.02,58.15 0.06,57.96 0.21,57.83 0.39,57.74 0.57,57.66 0.76,57.59 0.94,57.52 1.13,57.46 1.32,57.39 1.51,57.33 1.7,57.27 2.09,57.16 2.47,57.05 2.86,56.94 3.05,56.89 3.83,56.7 4.22,56.61 4.8,56.47 5.38,56.34 5.77,56.25 6.17,56.16 6.75,56.04 7.14,55.95 7.54,55.88 7.73,55.85 7.93,55.82 8.13,55.79 8.53,55.75 8.73,55.73 9.13,55.7 9.52,55.67 10.12,55.63 10.72,55.6 11.32,55.58 11.92,55.56 12.52,55.54 13.12,55.53 13.52,55.53
S$17
  pour Top: 346 corners
S$18
  pour Top: 42.07,64.58 42.22,64.71 42.37,64.84 42.52,64.98 42.81,65.25 43.25,65.67 43.68,66.09 44.1,66.51 44.53,66.93 45.09,67.5 45.64,68.08 46.06,68.51 46.47,68.95 46.88,69.39 47.28,69.83 47.55,70.13 47.81,70.43 47.94,70.58 48.07,70.74 48.19,70.89 48.31,71.06 48.42,71.22 48.53,71.39 48.75,71.72 48.97,72.06 49.18,72.4 49.38,72.74 49.59,73.09 49.79,73.43 49.99,73.78 50.19,74.13 50.48,74.65 50.67,75 50.86,75.36 51.13,75.89 51.31,76.25 51.48,76.61 51.66,76.97 51.82,77.33 51.98,77.7 52.06,77.88 52.14,78.07 52.21,78.25 52.28,78.44 52.34,78.63 52.46,79.01 52.64,79.59 52.81,80.16 52.97,80.74 53.13,81.32 53.23,81.71 53.28,81.9 53.32,82.09 53.41,82.48 53.49,82.88 53.56,83.27 53.62,83.67 53.65,83.86 53.68,84.06 53.7,84.26 53.72,84.46 53.74,84.66 53.75,84.86 53.75,85.06 53.75,85.26 53.74,85.46 53.72,85.66 53.68,85.85 53.63,86.05 53.53,86.22 53.37,86.34 53.18,86.36 53.07,86.2 53.03,86 53.01,85.81 53,85.61 53,85.21 52.98,85.01 52.97,84.81 52.94,84.61 52.92,84.41 52.86,84.01 52.79,83.62 52.72,83.23 52.68,83.03 52.59,82.64 52.5,82.25 52.4,81.86 52.25,81.28 52.09,80.71 51.92,80.13 51.75,79.55 51.57,78.98 51.51,78.79 51.45,78.6 51.38,78.41 51.3,78.23 51.22,78.04 51.06,77.68 50.98,77.5 50.81,77.13 50.72,76.95 50.54,76.6 50.27,76.06 50.08,75.71 49.89,75.36 49.7,75.01 49.6,74.83 49.4,74.49 49.2,74.14 48.99,73.8 48.78,73.46 48.47,72.95 48.26,72.61 48.04,72.27 47.83,71.93 47.61,71.6 47.49,71.44 47.38,71.27 47.26,71.11 47.13,70.96 47,70.8 46.87,70.65 46.61,70.35 46.21,69.91 45.8,69.46 45.39,69.03 45.11,68.74 44.83,68.45 44.41,68.02 43.85,67.46 43.57,67.17 43.29,66.88 43.02,66.59 42.75,66.29 42.62,66.14 42.36,65.84 42.23,65.68 42.11,65.53 41.99,65.37 41.87,65.2 41.77,65.03 41.76,64.83 41.8,64.64 41.93,64.5
S$19
  pour Top: 39.72,69 39.85,69.16 39.97,69.31 40.1,69.46 40.23,69.62 40.36,69.77 40.5,69.92 40.63,70.07 40.75,70.22 40.87,70.39 40.99,70.55 41.09,70.72 41.19,70.89 41.26,71.08 41.3,71.27 41.33,71.47 41.35,71.67 41.37,71.87 41.39,72.07 41.4,72.27 41.42,72.47 41.43,72.87 41.44,73.27 41.44,73.67 41.44,74.07 41.43,74.47 41.42,74.67 41.4,75.07 41.39,75.27 41.38,75.47 41.36,75.66 41.33,75.86 41.3,76.06 41.23,76.25 41.05,76.18 40.9,76.04 40.79,75.88 40.64,75.74 40.47,75.64 40.28,75.6 39.68,75.55 39.48,75.52 39.35,75.41 39.47,75.25 39.62,75.12 39.77,74.98 39.91,74.84 40.04,74.69 40.16,74.53 40.25,74.35 40.2,74.17 40.52,74.08 40.57,74.24 40.74,74.17 40.67,74.01 40.52,74.07 40.19,74.15 40.1,73.99 39.98,73.83 39.86,73.67 39.73,73.51 39.59,73.37 39.45,73.23 39.29,73.1 39.13,72.99 38.95,72.9 38.76,72.83 38.57,72.78 38.37,72.75 38.17,72.75 37.97,72.78 37.78,72.82 37.59,72.89 37.41,72.97 37.23,73.07 37.07,73.19 36.93,73.32 36.8,73.48 36.69,73.65 36.61,73.83 36.56,74.02 36.55,74.22 36.59,74.42 36.64,74.61 36.69,74.8 36.75,75 36.82,75.18 36.89,75.37 36.95,75.56 36.87,75.72 36.67,75.73 36.47,75.71 36.28,75.66 36.1,75.57 35.96,75.43 35.86,75.25 35.79,75.07 35.74,74.87 35.7,74.68 35.68,74.48 35.66,74.28 35.66,74.08 35.68,73.88 35.71,73.68 35.75,73.49 35.8,73.29 35.87,73.11 35.95,72.92 36.05,72.75 36.16,72.59 36.3,72.44 36.45,72.31 36.62,72.2 36.8,72.12 37,72.08 37.2,72.05 37.39,72.04 37.59,72.03 37.79,72.02 37.99,72.03 38.19,72.03 38.39,72.04 38.59,72.06 38.79,72.08 38.99,72.11 39.18,72.16 39.38,72.21 39.57,72.27 39.75,72.34 39.93,72.43 40.09,72.55 40.22,72.7 40.36,72.85 40.52,72.97 40.68,72.93 40.72,72.74 40.73,72.54 40.72,72.34 40.71,72.14 40.7,71.94 40.67,71.74 40.63,71.55 40.59,71.35 40.53,71.16 40.47,70.97 40.4,70.78 40.33,70.59 40.25,70.41 40.17,70.23 40.08,70.05 39.98,69.87 39.77,69.54 39.66,69.37 39.56,69.2 39.46,69.02 39.37,68.85 39.28,68.66 39.33,68.55 39.48,68.68 39.61,68.84
S$20
  pour Top: 38.45,76.31 38.65,76.32 38.85,76.33 39.03,76.38 38.84,76.44 38.64,76.46 38.44,76.47 38.24,76.46 38.05,76.44 37.85,76.41 37.91,76.33 38.11,76.32 38.31,76.31
S$21
  pour Top: 41.02,77.22 41.14,77.38 41.18,77.57 41.17,77.77 41.13,77.97 41.07,78.16 41.01,78.35 40.93,78.53 40.84,78.71 40.72,78.87 40.54,78.95 40.34,78.93 40.22,78.78 40.2,78.58 40.22,78.38 40.26,78.19 40.31,77.99 40.37,77.8 40.44,77.62 40.53,77.44 40.65,77.28 40.82,77.17
S$22
  pour Top: 39.42,79.5 39.61,79.56 39.8,79.63 39.98,79.71 40.06,79.89 39.97,80.07 39.86,80.23 39.73,80.38 39.59,80.53 39.45,80.67 39.31,80.81 39.17,80.95 39.02,81.09 38.87,81.21 38.71,81.34 38.54,81.45 38.37,81.56 38.2,81.65 38.01,81.73 37.82,81.75 37.62,81.71 37.61,81.53 37.72,81.36 37.85,81.21 37.98,81.05 38.11,80.9 38.51,80.46 38.78,80.16 39.05,79.87 39.19,79.72 39.33,79.58
S$23
  pour Top: 36.75,82.87 36.62,83 36.5,82.87
S$24
  pour Top: 34.02,83 34.21,83.05 34.19,83.22 34.04,83.35 33.85,83.42 33.75,83.27 33.82,83.08 33.99,83
S$25
  pour Top: 36.13,83 36.25,83.13 36.11,83.25 36,83.11
S$26
  pour Top: 209 corners
S$27
  pour Top: 48.41,89.76 48.49,89.92 48.33,89.99 48.26,89.83
S$28
  pour Top: 48.56,91.43 49.56,91.46 50.16,91.48 50.76,91.5 51.16,91.52 51.56,91.55 51.76,91.56 51.96,91.58 52.16,91.6 52.36,91.63 52.55,91.66 52.75,91.7 52.94,91.75 53.13,91.83 53.3,91.92 53.47,92.04 54.09,92.54 53.97,92.55 51.98,92.38 51.58,92.36 51.18,92.33 50.78,92.32 50.18,92.29 49.58,92.27 48.78,92.25 48.18,92.24 47.38,92.23 46.58,92.23 45.98,92.23 45.38,92.23 44.78,92.25 44.38,92.26 43.78,92.28 43.38,92.3 42.98,92.32 42.58,92.34 42.18,92.37 41.78,92.4 41.39,92.44 40.79,92.5 40.39,92.54 39.79,92.61 39.2,92.69 38.8,92.74 38.21,92.82 37.81,92.88 37.22,92.98 36.83,93.04 36.24,93.14 35.84,93.22 35.25,93.33 34.86,93.41 34.47,93.49 34.08,93.58 33.69,93.66 33.1,93.8 32.52,93.94 32.13,94.04 31.75,94.15 31.17,94.3 30.59,94.47 30.21,94.58 29.63,94.75 29.25,94.87 28.68,95.05 28.11,95.23 27.54,95.43 26.97,95.63 26.41,95.83 25.85,96.04 25.29,96.25 24.73,96.47 24.36,96.62 23.99,96.78 23.62,96.93 23.25,97.09 22.89,97.26 22.71,97.34 21.62,97.86 21.08,98.11 20.72,98.28 20.53,98.36 20.35,98.43 20.16,98.5 19.97,98.57 19.78,98.62 19.58,98.6 19.5,98.43 19.53,98.23 19.61,98.05 19.73,97.89 19.87,97.74 20.02,97.62 20.19,97.5 20.36,97.39 20.53,97.29 20.71,97.2 20.88,97.11 21.24,96.93 21.79,96.68 22.33,96.43 22.88,96.18 23.43,95.94 23.8,95.79 23.98,95.71 24.35,95.56 24.91,95.35 25.48,95.14 25.85,95 26.23,94.87 26.8,94.67 27.55,94.41 28.12,94.22 28.69,94.04 29.27,93.86 29.84,93.69 30.61,93.46 31.38,93.24 32.15,93.02 32.92,92.81 33.5,92.66 33.88,92.56 34.08,92.51 34.27,92.47 34.47,92.43 34.86,92.35 35.26,92.28 35.65,92.21 36.24,92.11 36.84,92.02 37.23,91.96 37.63,91.91 38.22,91.84 38.82,91.77 39.42,91.7 40.01,91.64 40.61,91.58 41.21,91.52 41.61,91.49 41.8,91.48 42.2,91.45 42.8,91.43 43.2,91.42 43.6,91.41 44.4,91.39 45,91.39 45.4,91.39 46.4,91.39 47,91.39 47.4,91.4 48.2,91.42
S$29
  pour Top: 31.75,91.86 31.63,92 31.5,91.88 31.62,91.75
S$30
  pour Top: 59.01,92.44 59.2,92.47 59.6,92.55 59.79,92.59 60.18,92.68 60.38,92.73 60.76,92.82 60.96,92.87 61.34,92.97 61.73,93.08 62.11,93.19 62.69,93.36 63.26,93.54 64.03,93.77 64.79,94 65.94,94.36 66.32,94.48 66.51,94.54 66.89,94.68 67.45,94.88 68.02,95.09 68.58,95.3 69.13,95.52 69.88,95.82 70.43,96.05 70.8,96.21 71.17,96.36 71.53,96.52 71.9,96.69 72.26,96.85 72.62,97.02 73.35,97.36 73.89,97.62 74.25,97.8 74.42,97.9 74.6,97.99 74.77,98.09 74.95,98.19 75.12,98.3 75.28,98.41 75.44,98.53 75.58,98.68 75.68,98.85 75.72,99.04 75.73,99.24 75.72,99.44 75.56,99.46 75.38,99.38 74.83,99.13 74.29,98.88 73.2,98.37 72.3,97.94 71.93,97.77 71.57,97.61 71.2,97.45 70.83,97.29 70.47,97.14 70.1,96.99 69.54,96.76 68.98,96.54 68.42,96.33 68.05,96.18 67.48,95.97 66.92,95.77 66.36,95.57 65.79,95.37 65.41,95.25 65.03,95.12 64.46,94.94 63.69,94.71 63.12,94.54 62.54,94.37 61.96,94.2 61.19,93.99 60.61,93.83 60.03,93.68 59.45,93.54 59.06,93.45 58.87,93.4 57.89,93.2 57.5,93.12 57.3,93.08 57.11,93.03 56.92,92.97 56.77,92.85 56.91,92.72 57.09,92.63 57.28,92.55 57.47,92.49 57.66,92.45 57.86,92.42 58.06,92.4 58.26,92.39 58.46,92.39 58.66,92.4 58.86,92.42
S$31
  pour Top: 44.48,93.3 44.45,93.48 44.27,93.44 44.31,93.27
S$32
  pour Top: 44.97,93.29 44.96,93.47 44.78,93.45 44.8,93.28
S$33
  pour Top: 40.45,93.53 40.47,93.71 40.29,93.72 40.29,93.54
S$34
  pour Top: 49.19,93.52 49.23,93.7 49.05,93.73 49.03,93.55
S$35
  pour Top: 38.43,93.76 38.49,93.93 38.31,93.98 38.27,93.81
S$36
  pour Top: 53.17,94.01 53.24,94.17 53.08,94.24 53.01,94.07
S$37
  pour Top: 34.32,94.5 34.45,94.62 34.29,94.73 34.1,94.68 34.09,94.53
S$38
  pour Top: 335 corners
S$39
  pour Top: 59,96.34 58.9,96.5 58.75,96.4 58.85,96.25
S$40
  pour Top: 25.49,97.83 25.42,97.99 25.26,97.91 25.34,97.76
S$41
  pour Top: 18.06,99.25 18.86,99.25 18.72,99.35 17.02,100.4 16.68,100.61 16.17,100.93 15.67,101.25 14.83,101.8 14.33,102.13 13.83,102.47 13.34,102.8 13.01,103.03 12.68,103.26 12.52,103.38 12.36,103.5 12.2,103.62 12.04,103.74 11.73,103.99 11.57,104.11 11.26,104.37 10.96,104.63 10.65,104.89 10.2,105.28 9.9,105.55 9.6,105.81 9.31,106.08 9.01,106.35 8.43,106.9 7.85,107.45 7.42,107.87 6.85,108.43 6.29,109 5.73,109.57 5.45,109.86 5.18,110.15 4.91,110.45 4.64,110.74 4.23,111.19 3.97,111.48 3.7,111.78 3.31,112.24 3.05,112.55 2.8,112.85 2.55,113.17 2.43,113.32 2.18,113.64 1.94,113.96 1.83,114.12 1.71,114.29 1.26,114.95 1.03,115.28 0.8,115.6 0.68,115.76 0.56,115.92 0.43,116.07 0.28,116.21 0.11,116.2 0.06,116 0.04,115.81 0.05,115.61 0.09,115.41 0.14,115.22 0.21,115.03 0.3,114.85 0.38,114.67 0.48,114.49 0.58,114.32 0.68,114.15 0.78,113.98 0.89,113.81 1.11,113.47 1.22,113.31 1.34,113.15 1.46,112.99 1.59,112.83 1.71,112.68 1.97,112.37 2.23,112.06 2.62,111.61 3.02,111.16 3.42,110.72 3.82,110.27 4.37,109.69 4.78,109.25 5.2,108.82 5.62,108.39 6.04,107.96 6.6,107.4 7.17,106.84 7.6,106.42 8.03,106 8.47,105.59 8.76,105.31 9.06,105.04 9.35,104.78 9.65,104.51 9.95,104.25 10.26,103.99 10.57,103.73 10.88,103.48 11.19,103.23 11.51,102.99 11.82,102.74 12.15,102.51 12.47,102.27 12.79,102.04 13.29,101.69 13.78,101.35 14.28,101.02 14.77,100.68 15.11,100.46 15.44,100.24 15.78,100.03 15.95,99.93 16.13,99.83 16.3,99.73 16.48,99.63 16.66,99.55 16.84,99.46 17.03,99.39 17.22,99.33 17.41,99.29 17.61,99.26 17.81,99.25
S$42